# EAGLE board hdi20-floppy (EAGLE 6.5.0)
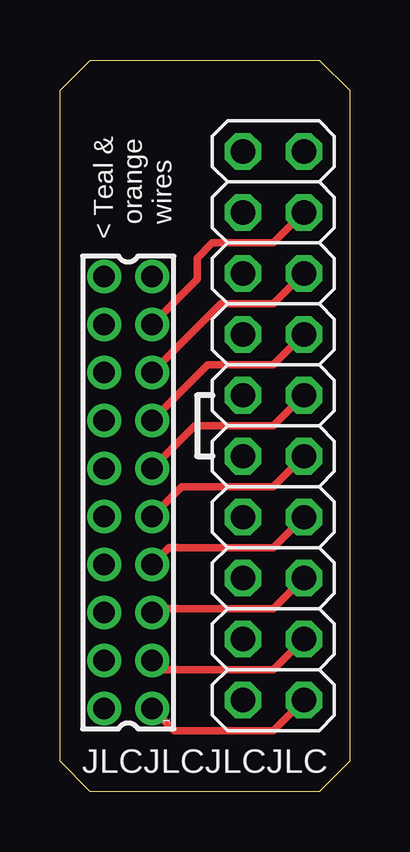
[diagram p0: board, top side]
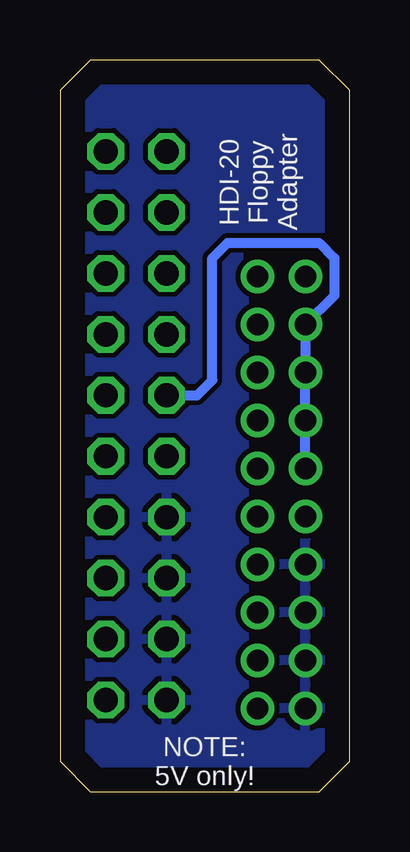
[diagram p1: board, bottom side, seen from below]

Size 12.06 x 30.48 mm. Coordinates in mm from the lower left corner, seen from the top.
Outline: 1.27,0 0,1.27 0,29.21 1.27,30.48 10.79,30.48 12.06,29.21 12.06,1.27 10.79,0 1.27,0
Copper layers (1*16): Top 0.035mm / dielectric 1.5mm / Bottom 0.035mm
Design rules "default": minimum track width 10mil, minimum drill 24mil, track to track 8mil, track to pad 8mil, pad to pad 8mil, via to via 8mil, smd to smd 8mil, copper to edge 40mil, drill to drill 8mil, minimum pad ring 10mil, minimum via ring 8mil, stop-mask expansion 4mil, vias tented up to drill 0mil, thermal gap 10mil

## Footprints (pad centres in the part's own frame; a part is rotated, then mirrored left to right if it is on the bottom)
87758-2016 = drill 0.9 pad 1.27: 1 -9,-1; 2 -9,1; 3 -7,-1; 4 -7,1; 5 -5,-1; 6 -5,1; 7 -3,-1; 8 -3,1; 9 -1,-1; 10 -1,1; 11 1,-1; 12 1,1; 13 3,-1; 14 3,1; 15 5,-1; 16 5,1; 17 7,-1; 18 7,1; 19 9,-1; 20 9,1
2X10 = drill 1.016 octagon: 1 -11.43,-1.27; 2 -11.43,1.27; 3 -8.89,-1.27; 4 -8.89,1.27; 5 -6.35,-1.27; 6 -6.35,1.27; 7 -3.81,-1.27; 8 -3.81,1.27; 9 -1.27,-1.27; 10 -1.27,1.27; 11 1.27,-1.27; 12 1.27,1.27; 13 3.81,-1.27; 14 3.81,1.27; 15 6.35,-1.27; 16 6.35,1.27; 17 8.89,-1.27; 18 8.89,1.27; 19 11.43,-1.27; 20 11.43,1.27

## Placement (x,y rotation side)
E$1  [87758-2016]  2.84,12.46 90 top
E$2  [2X10]  8.89,15.24 90 top

## Library data of the parts
E$1 = con-molex
E$2 = pinhead

## Nets
GND: E$1.2 E$1.4 E$1.6 E$1.8 E$2.2 E$2.4 E$2.6 E$2.8
S$1: E$1.1 E$2.1
S$2: E$1.3 E$2.3
S$3: E$1.5 E$2.5
S$4: E$1.7 E$2.7
S$5: E$1.9 E$2.9
S$6: E$1.11 E$2.11
S$7: E$1.13 E$2.13
S$8: E$1.15 E$2.15
S$9: E$1.17 E$2.17
S$10: E$1.12 E$1.14 E$1.16 E$1.18 E$2.12

## Tracks (layer width: path | path; a pad name or v marks a point on that pad's centre or on a via)
GND
  pour Bottom: 1.59,30.16 10.48,30.16 11.75,28.89 11.75,1.59 10.48,0.32 1.59,0.32 0.32,1.59 0.32,28.89
S$1
  Top 0.305: E$2.1 8.89,2.54 4.76,2.54 E$1.1
S$2
  Top 0.305: E$2.3 8.89,5.08 4.22,5.08 E$1.3
S$3
  Top 0.305: E$2.5 8.89,7.62 4,7.62 E$1.5
S$4
  Top 0.305: E$2.7 8.89,10.16 4.54,10.16 E$1.7
S$5
  Top 0.305: E$2.9 8.89,12.7 5.08,12.7 E$1.9
S$6
  Top 0.305: E$2.11 8.89,15.24 5.62,15.24 E$1.11
S$7
  Top 0.305: E$2.13 8.89,17.78 6.16,17.78 E$1.13
S$8
  Top 0.305: E$2.15 8.89,20.32 6.7,20.32 E$1.15
S$9
  Top 0.305: E$2.17 8.89,22.86 6.35,22.86 5.71,22.23 5.71,21.34 E$1.17
S$10
  Bottom 0.406: E$1.12 E$1.14 E$1.16 E$1.18 0.64,20.66 0.64,22.23 1.27,22.86 5.08,22.86 5.71,22.23 5.71,17.14 6.35,16.51 E$2.12

## Text on the board
tNames: < Teal & / orange / wires | JLCJLCJLCJLC
bNames: HDI-20 / Floppy / Adapter | NOTE: / 5V only!